# Altium PCB PCB2.PcbDoc
Units mil, origin at the board's own origin, x right, y up, seen from the top; angles counter-clockwise.
Board outline 3530 x 3213.31 mil, 4 copper layers (Top Layer, Layer 1, Layer 2, Bottom Layer), stack 63.779 mil thick; 41 components, 21 nets, 168 pads, 525 vias.
Unrouted connection lines stored in the file: 24.
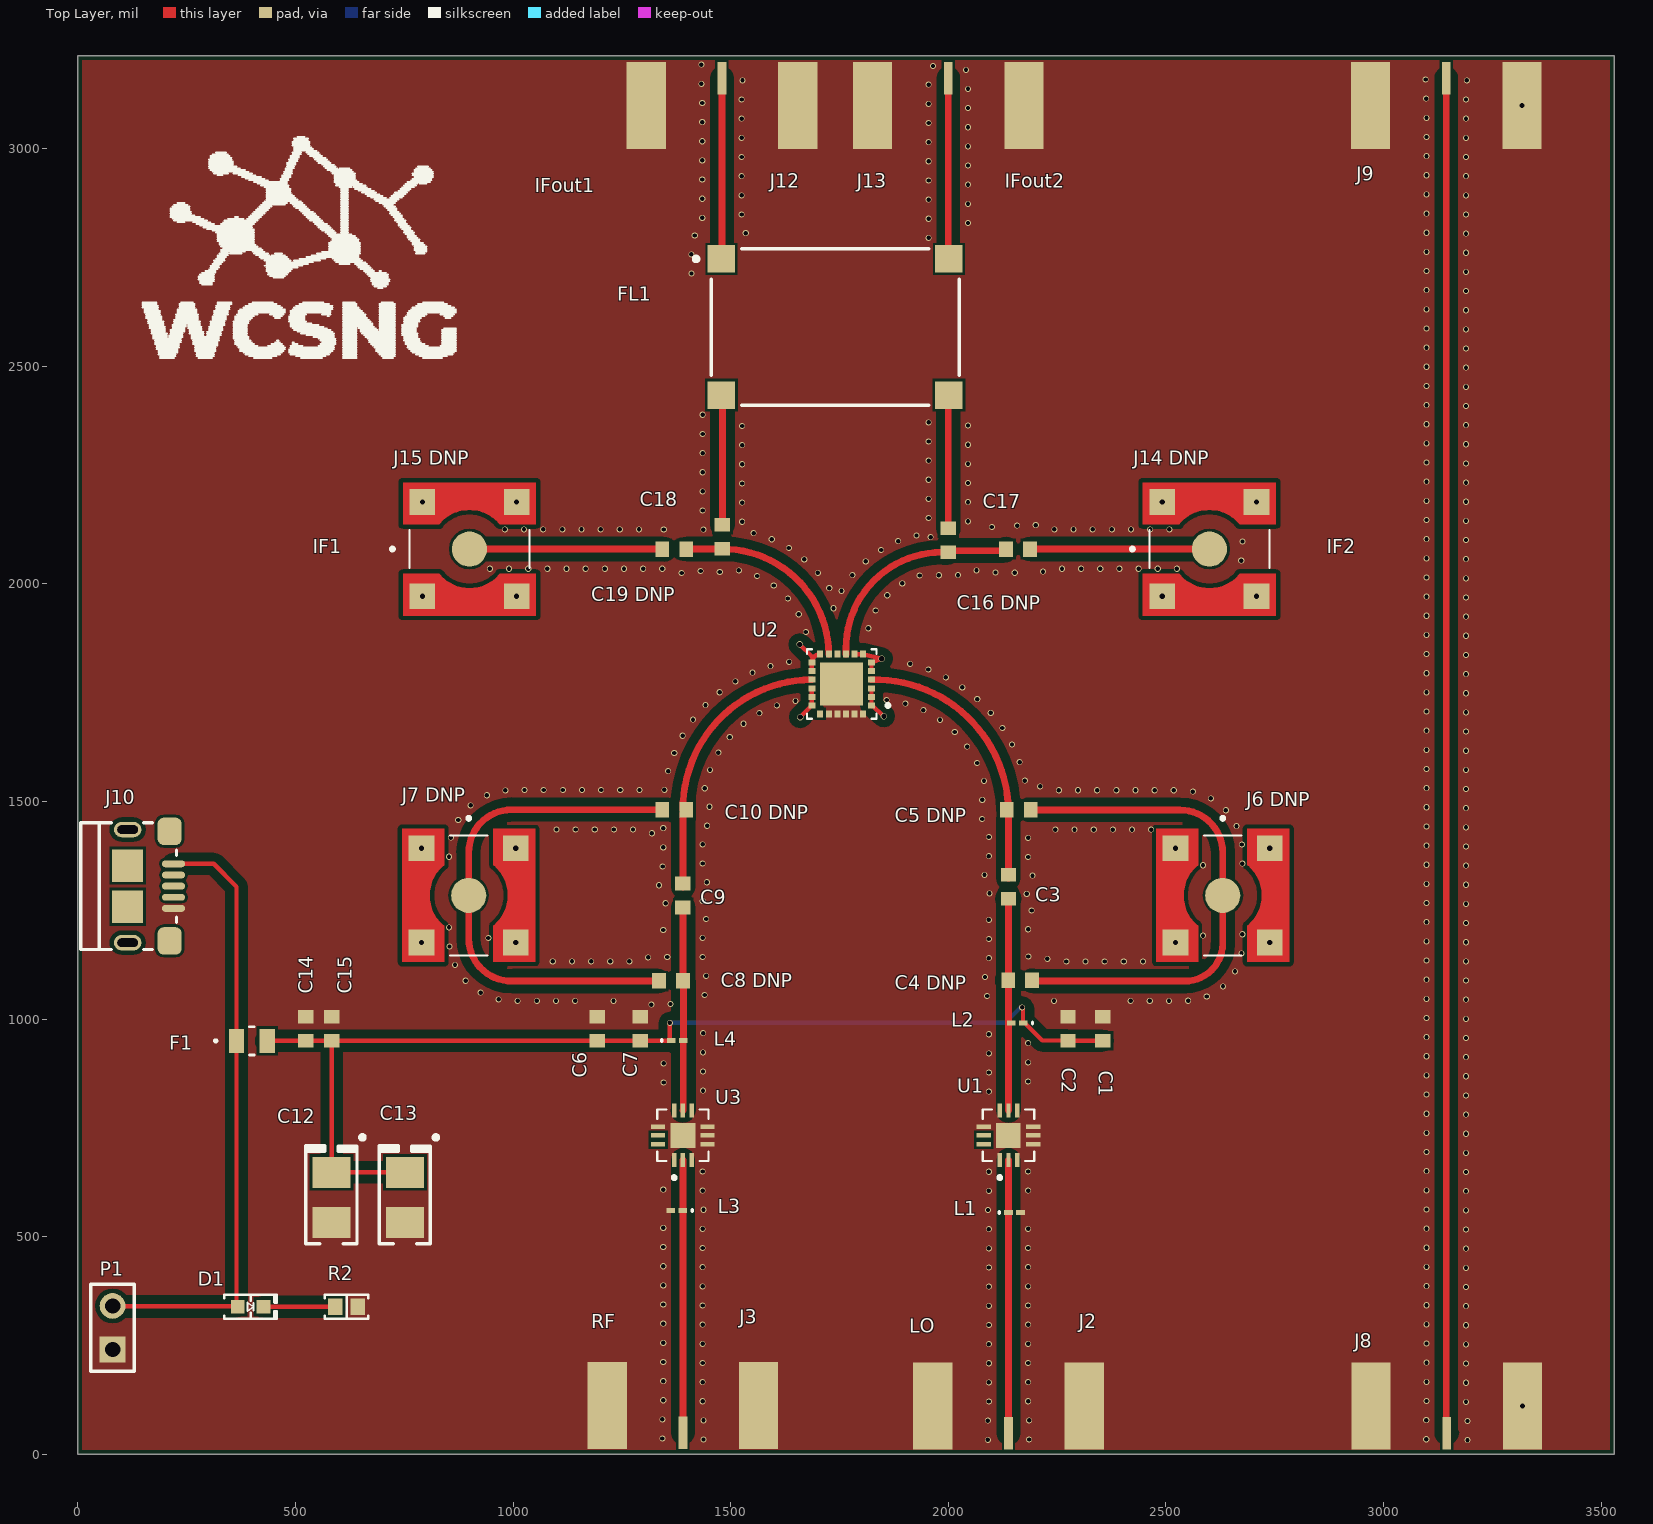
[diagram p0: Top Layer view]
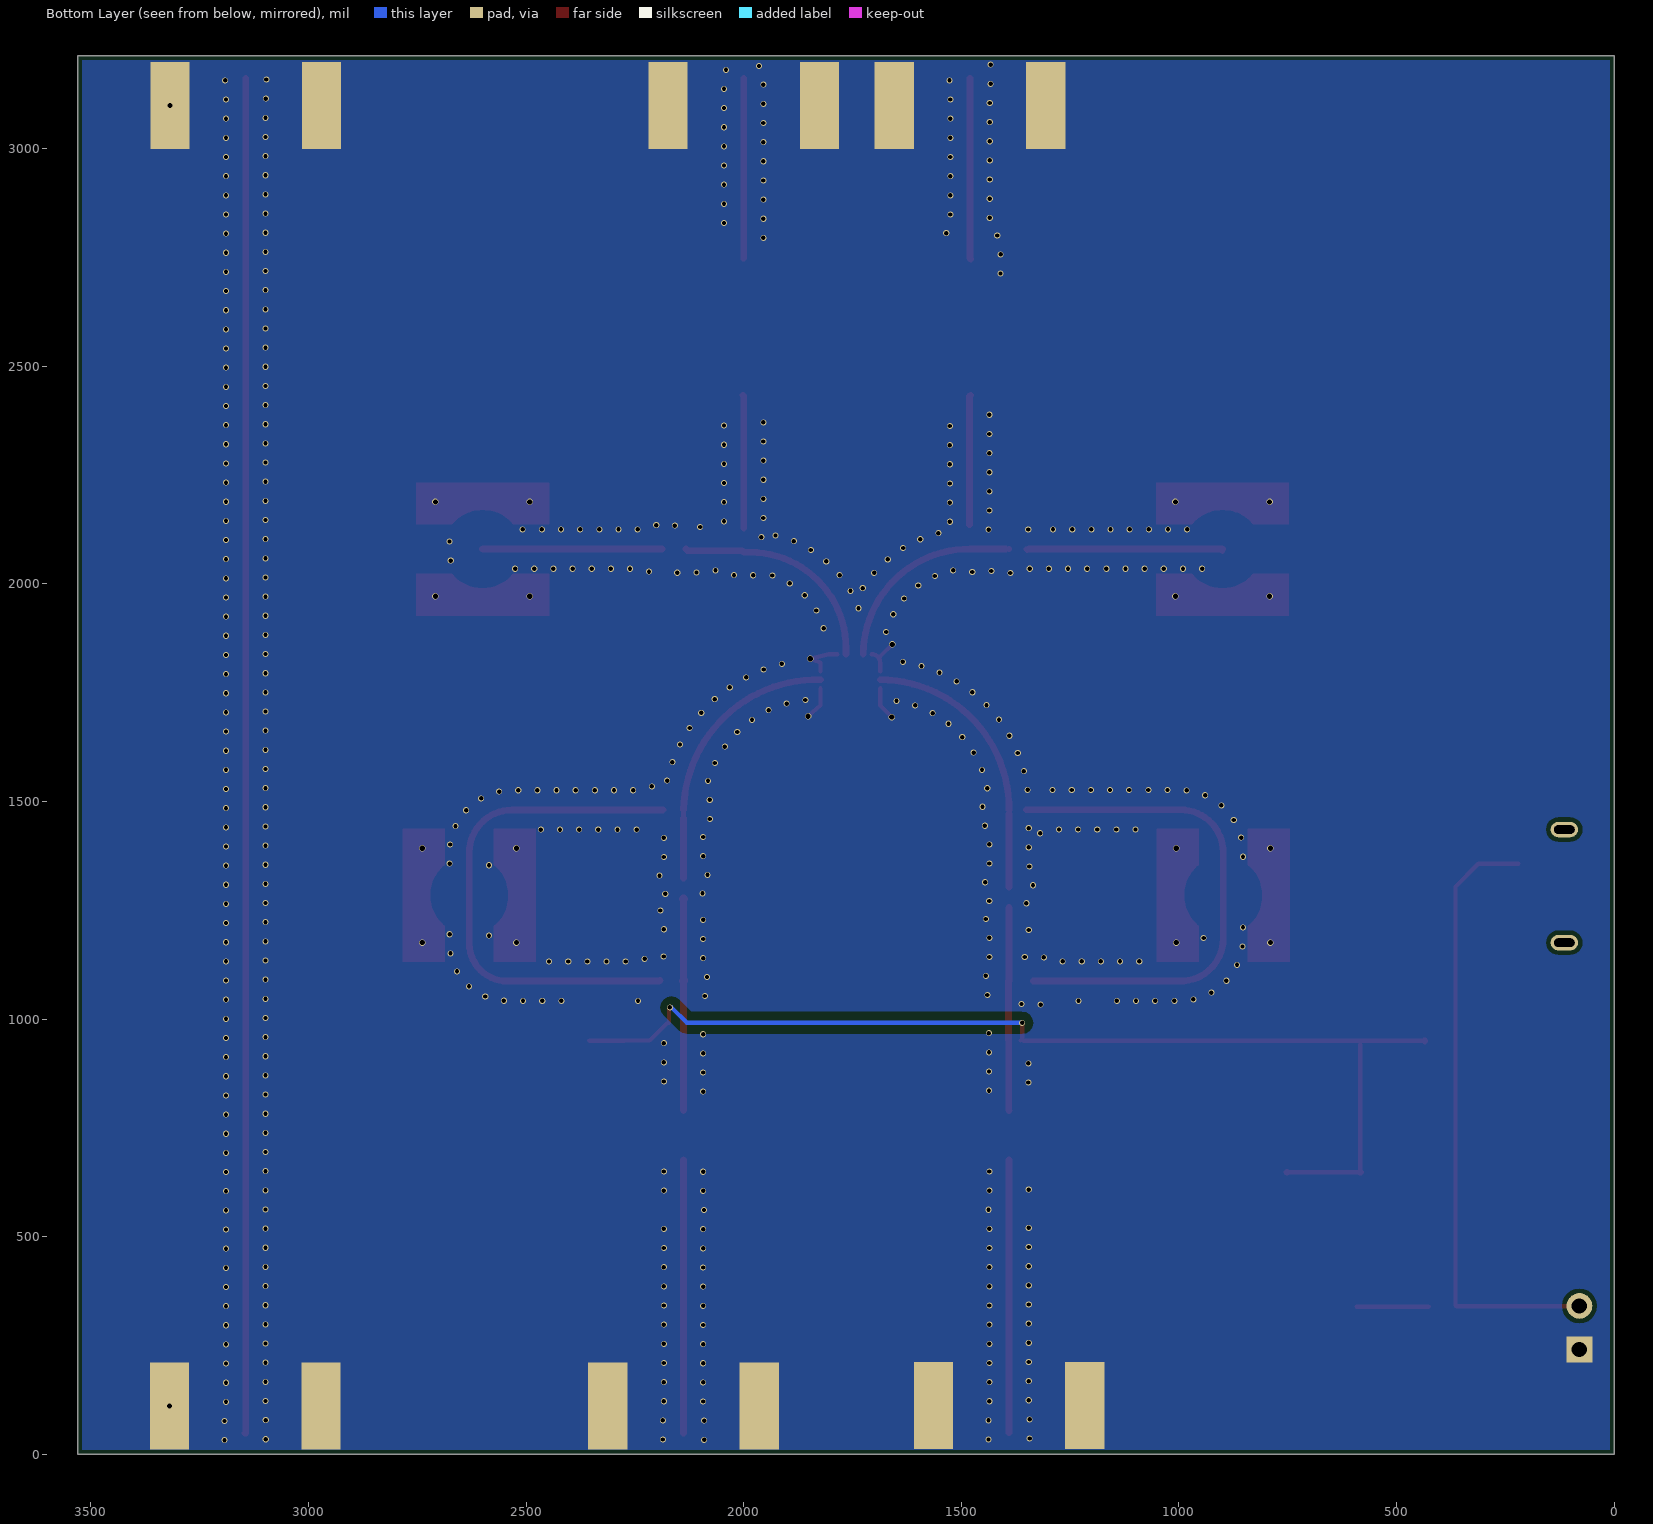
[diagram p1: Bottom Layer view, seen from below]

## Layer stack, top to bottom
Top Solder: solder mask 0.4, Solder Resist, Dk 3.5
Top Layer: signal copper 1.3778
prepreg_top: prepreg 6.8898, FR-4, Dk 4.2
Layer 1: signal copper 1.3778
core: core 44.4882, Core-025, Dk 4.2
Layer 2: signal copper 1.3778
prepreg_bottom: prepreg 6.8898, FR-4, Dk 4.2
Bottom Layer: signal copper 1.3778
Bottom Solder: solder mask 0.4, Solder Resist, Dk 3.5

## Board outline
0,3213.31 0,0 3530,0 3530,3213.31

## Design rules (kind name [scope] priority, off if disabled: settings)
BoardOutlineClearance [All] p1: gap=10 ignorepadtopadclearanceinfootprint=FALSE except(0: Arc-SplitContinuation Track-SplitContinuation SMDPad-SplitContinuation THPad-SplitContinuation Via-SplitContinuation Fill-SplitContinuation Poly-SplitContinuation Region-SplitContinuation Text-SplitContinuation)
Clearance [All] p1: gap=10 ignorepadtopadclearanceinfootprint=TRUE except(4: SMDPad-SMDPad; 6: Arc-Arc Arc-Track Arc-SMDPad Arc-Via Track-Track Track-SMDPad Track-Via SMDPad-Via SMDPad-Fill SMDPad-Poly SMDPad-Region; 13: Arc-Hole Track-Hole; 20: Arc-Fill Arc-Poly Arc-Region Track-Fill Track-Poly Track-Region)
MinimumSolderMaskSliver [All] p1: minsoldermaskwidth=1
PolygonConnect [All] p1: connectstyle=Direct reliefconductorwidth=10 reliefentries=4 polygonreliefangle="90 Angle" airgapwidth=10
RoutingVias [All] p1: holewidth=10 width=14 viastyle="Through Hole" minholewidth=10 minwidth=14 maxholewidth=16 maxwidth=20
SilkToSolderMaskClearance [IsPad] p1: minsilkscreentomaskgap=6 clearancetoexposedcopper=TRUE
SolderMaskExpansion [All] p1: expansion=4 istentingtop=FALSE
Width "Schematic Width Constraint_3" [InNet('GND')] p1: maxlimit=10 minlimit=10 preferedwidth=10
Width "Schematic Width Constraint_1" [InNet('NetD1_1')] p2: maxlimit=10 minlimit=10 preferedwidth=10
Width "Schematic Width Constraint" [InNet('NetD1_2')] p3: maxlimit=10 minlimit=10 preferedwidth=10
Width [All] p4: maxlimit=20 minlimit=3 preferedwidth=15.56
28 further rules are at their usual default settings.

## Components (designator, comment, footprint, x,y, rotation, side; value= is the part's Value field where it differs from the comment)
C1 "Cap Semi" 1608[0603] 2354.88,978 r90 top value=10nF
C2 "Cap Semi" 1608[0603] 2275,978 r90 top value=10pF
C3 "Cap Semi" 1608[0603] 2138.35,1303.86 r90 top value=100pF
"C4 DNP" "Cap Semi" 1608[0603] 2165,1089 r180 top value=100pF
"C5 DNP" "Cap Semi" 1608[0603] 2162,1481 r180 top value=100pF
C6 "Cap Semi" 1608[0603] 1193.46,978 r90 top value=10nF
C7 "Cap Semi" 1608[0603] 1291.89,978 r90 top value=10pF
"C8 DNP" "Cap Semi" 1608[0603] 1363,1088 r0 top value=100pF
C9 "Cap Semi" 1608[0603] 1390.32,1284.17 r90 top value=100pF
"C10 DNP" "Cap Semi" 1608[0603] 1370.63,1481.02 r0 top value=100pF
C12 "10µF" "CAP POL 1411_3528" 583.23,590.52 r270 top
C13 "10µF" "CAP POL 1411_3528" 752,590.52 r270 top
C14 "Cap Semi" 1608[0603] 524,978 r90 top value=1uF
C15 "Cap Semi" 1608[0603] 583.23,978 r90 top value=100nF
"C16 DNP" "Cap Semi" 1608[0603] 2160.31,2080 r0 top value=100pF
C17 "Cap Semi" 1608[0603] 2000,2100 r270 top value=100pF
C18 "Cap Semi" 1608[0603] 1481,2108 r270 top value=100pF
"C19 DNP" "Cap Semi" 1608[0603] 1370.31,2080 r0 top value=100pF
D1 "Blue" "LED 0603_1608 BLUE" 397,339 r0 top
F1 "Part Number: MFU0805FF01000P100" FUS_VISHAY_MFU08 400,950 r0 top value=Value
FL1 "11305-3S" Anaren_11305-3S_MFG 1740,2590 r0 top
J2 "SMA 50 Ohm edge" "SMA-OSHPARK-4L-1.6MM- ALT3" 2138.35,10 r90 top
J3 "SMA 50 Ohm edge" "SMA-OSHPARK-4L-1.6MM- ALT3" 1390.31,11.5 r90 top
"J6 DNP" "CONSMA001-SMD-G" *LINX_CONSMA001-SMD-G_CONSMA001-SMD-G(Primary) 2630.47,1284.17 r0 top
"J7 DNP" "CONSMA001-SMD-G" *LINX_CONSMA001-SMD-G_CONSMA001-SMD-G(Primary) 898.19,1284.17 r0 top
J8 "SMA 50 Ohm edge" "SMA-OSHPARK-4L-1.6MM- ALT3" 3145.45,10 r90 top
J9 "SMA 50 Ohm edge" "SMA-OSHPARK-4L-1.6MM- ALT3" 3144,3200 r270 top
J10 "10118193-0001LF" "FCI USB 10118193-0001LF" 116.65,1305.59 r90 top
J12 "SMA 50 Ohm edge" "SMA-OSHPARK-4L-1.6MM- ALT3" 1480,3200 r270 top
J13 "SMA 50 Ohm edge" "SMA-OSHPARK-4L-1.6MM- ALT3" 2000,3200 r270 top
"J14 DNP" "CONSMA001-SMD-G" *LINX_CONSMA001-SMD-G_CONSMA001-SMD-G(Primary) 2600,2080 r90 top
"J15 DNP" "CONSMA001-SMD-G" *LINX_CONSMA001-SMD-G_CONSMA001-SMD-G(Primary) 900,2080 r90 top
L1 "Inductor" 0603 2152.13,555.83 r0 top value=18nH
L2 "Inductor" 0603 2158,991 r180 top value=39nH
L3 "Inductor" 0603 1376.53,560 r180 top value=18nH
L4 "Inductor" 0603 1377,951 r0 top value=39nH
P1 "Header 2" HDR1X2 80,241 r90 top
R2 "1 kOhms" "RES 0603_1608" 617.59,339 r180 top
U1 "PMA3-83LN+" *QFN51P300X300X89-13N#1 2138.35,732.99 r90 top
U2 "HMC8193LC4" *PQFN50P390X390X100-25N 1755,1770 r180 top
U3 "PMA3-83LN+" *QFN51P300X300X89-13N#2 1390.31,732.99 r90 top

## Footprints (in the part's own frame and the unit in brackets; to place one, negate y for a bottom-side part, rotate by r counter-clockwise, add the part's x,y. Pads: shape width x height; smd on the part's side, far side on the other; paste and mask are expansions set on the pad)
0603 [mm] "Chip Inductor, Body 0.6x0.3mm, IPC High Density"
  rect 0.5x0.3 smd: 1(-0.35,0) 2(0.35,0)
  silkscreen extent -0.9,-0.05 -0.9,0.05, body extent -0.33,-0.18 0.33,0.18, height 0.55
1608[0603] [mm] "Chip Capacitor, Body 1.6x0.8mm, IPC High Density"
  rect 0.8x0.9 smd: 1(-0.7,0) 2(0.7,0)
  body extent -0.87,-0.48 0.87,0.48, height 1.3
*LINX_CONSMA001-SMD-G_CONSMA001-SMD-G(Primary) [mm]
  round 2.05 smd: C(0,0)
  rect 1.5x1.5 smd: G1(-2.75,2.75) G2(-2.75,-2.75) G3(2.75,-2.75) G4(2.75,2.75)
  Top Layer region: 1.44,-3.88 1.44,-1.76 1.54,-1.68 1.618,-1.605 1.705,-1.512 1.787,-1.415 1.864,-1.312 1.934,-1.206 1.999,-1.096 2.057,-0.983 2.109,-0.866 2.154,-0.747 2.193,-0.625 2.225,-0.501 2.249,-0.376 2.267,-0.25 2.278,-0.123 2.281,0.005 2.278,0.133 2.267,0.26 2.249,0.386 2.225,0.511 2.193,0.635 2.154,0.757 2.109,0.876 2.057,0.993 1.999,1.106 1.934,1.216 1.864,1.322 1.787,1.425 1.705,1.522 1.618,1.615 1.54,1.69 1.44,1.76 1.44,3.88 3.88,3.88 3.88,-3.88 1.44,-3.88
  Top Layer region: -1.44,3.88 -1.44,1.76 -1.54,1.68 -1.644,1.579 -1.728,1.486 -1.807,1.389 -1.88,1.288 -1.948,1.183 -2.01,1.075 -2.066,0.963 -2.116,0.849 -2.159,0.732 -2.197,0.612 -2.227,0.491 -2.251,0.368 -2.268,0.244 -2.278,0.12 -2.281,-0.005 -2.278,-0.13 -2.268,-0.254 -2.251,-0.378 -2.227,-0.501 -2.197,-0.622 -2.159,-0.742 -2.116,-0.859 -2.066,-0.973 -2.01,-1.085 -1.948,-1.193 -1.88,-1.298 -1.807,-1.399 -1.728,-1.496 -1.644,-1.589 -1.54,-1.69 -1.44,-1.76 -1.44,-3.88 -3.88,-3.88 -3.88,3.88 -1.44,3.88
  silkscreen extent -1.1,-3.5 1.1,4.6
*PQFN50P390X390X100-25N [mm]
  rect 0.41x0.35 smd: 1(-1.74,1.25) 2(-1.74,0.75) 3(-1.74,0.25) 4(-1.74,-0.25) 5(-1.74,-0.75) 6(-1.74,-1.25) 13(1.74,-1.25) 14(1.74,-0.75) 15(1.74,-0.25) 16(1.74,0.25) 17(1.74,0.75) 18(1.74,1.25)
  rect 0.35x0.41 smd: 7(-1.25,-1.74) 8(-0.75,-1.74) 9(-0.25,-1.74) 10(0.25,-1.74) 11(0.75,-1.74) 12(1.25,-1.74) 19(1.25,1.74) 20(0.75,1.74) 21(0.25,1.74) 22(-0.25,1.74) 23(-0.75,1.74) 24(-1.25,1.74)
  rect 2.5x2.5 smd: 25(0,0)
  silkscreen extent -2.8,-2.03 2.03,2.03
*QFN51P300X300X89-13N#1 [mm]
  rect 0.82x0.26 smd: 1(-1.445,0.51) 2(-1.445,0) 3(-1.445,-0.51) 7(1.445,-0.51) 8(1.445,0) 9(1.445,0.51)
  rect 0.26x0.82 smd: 4(-0.51,-1.445) 5(0,-1.445) 6(0.51,-1.445) 10(0.51,1.445) 11(0,1.445) 12(-0.51,1.445)
  rect 1.45x1.45 smd: 13(0,0.011)
  silkscreen extent -2.56,-1.5 1.5,1.5
*QFN51P300X300X89-13N#2 [mm]
  rect 0.82x0.26 smd: 1(-1.445,0.51) 2(-1.445,0) 3(-1.445,-0.51) 7(1.445,-0.51) 8(1.445,0) 9(1.445,0.51)
  rect 0.26x0.82 smd: 4(-0.51,-1.445) 5(0,-1.445) 6(0.51,-1.445) 10(0.51,1.445) 11(0,1.445) 12(-0.51,1.445)
  rect 1.45x1.45 smd: 13(0,0)
  silkscreen extent -2.56,-1.5 1.5,1.5
Anaren_11305-3S_MFG [mm]
  rect 1.6x1.6 smd paste+0 mask+0: 1(-6.64,3.975) 2(6.64,3.975) 3(6.64,-3.975) 4(-6.64,-3.975)
  silkscreen extent -8.23,-4.57 7.23,4.57, body extent -7.54,-4.87 7.54,4.87, height 0.25
"CAP POL 1411_3528" [mm] "Molded Capacitor, 2-Leads, Body 3.50x2.80mm, IPC Medium Density"
  rect 1.8x2.23 smd: 1(-1.46,0) 2(1.46,0)
  silkscreen extent -3.62,-1.5 2.71,1.92, body extent -1.87,-1.45 1.86,1.45, height 2
"FCI USB 10118193-0001LF" [mm] "USB 2.0 Type B Micro"
  oval 0.4x1.35 smd: 1(1.3,-2.625) 2(0.65,-2.625) 3(0,-2.625) 4(-0.65,-2.625) 5(-1.3,-2.625)
  oval 0.9x1.6 hole 0.5 slot 1.2 at 90 deg: S(-3.3,0.05) S(3.3,0.05)
  rrect50% 1.6x1.4 smd: S(-3.2,-2.4) S(3.2,-2.4)
  rect 1.9x1.8 smd: S(-1.2,0.05) S(1.2,0.05)
  silkscreen extent -3.7,-2.8 3.7,2.8, body extent -3.93,-2.9 3.93,2.76, height 2.78
FUS_VISHAY_MFU08 [mil]
  rect 35.5x55 smd: 1(-35.25,0) 2(35.25,0)
  silkscreen extent -86,-32 5,32, body extent 0,0 10,10, height 10
HDR1X2 [mm] "Connector; Header; 2 Position"
  rect 1.5x1.5 hole 0.9: 1(0,0)
  round 1.5 hole 0.9: 2(2.54,0)
  silkscreen extent -1.27,-1.27 3.81,1.27
"LED 0603_1608 BLUE" [mm] "Chip Diode, 2-Leads, Body 1.60x0.80mm, IPC Medium Density"
  rect 0.8x0.8 smd: 1(-0.75,0) 2(0.75,0)
  silkscreen extent -1.52,-0.7 1.52,0.7, body extent -0.8,-0.4 0.8,0.4, height 0.53
"RES 0603_1608" [mm] "Chip Resistor, 2-Leads, Body 1.60x0.80mm, IPC Medium Density"
  rect 0.85x0.95 smd: 1(-0.65,0) 2(0.65,0)
  silkscreen extent -1.27,-0.7 1.27,0.7, body extent -0.8,-0.4 0.8,0.4, height 0.45
"SMA-OSHPARK-4L-1.6MM- ALT3" [mil] "Short and thin signal pin"
  rect 200x90 smd: GND(101,174) GND(101,-174)
  rect 200x90 smd far side: GND(101,174) GND(101,-174)
  rect 75x20 smd: SIG(38.5,0)

## Part data
C1 C2 C3 "C4 DNP" "C5 DNP" C6 C7 "C8 DNP" C9 "C10 DNP" C14 C15 "C16 DNP" C17 C18 "C19 DNP": "Capacitor (Semiconductor SIM Model)", LatestRevisionDate=29-May-2009, LatestRevisionNote="IPC-7351 Footprint Added.", PackageDescription="Chip Capacitor", PackageReference=C1206, Published=8-Jun-2000, Publisher="Altium Limited"
C12 C13: library part T491T106K016AT, "CAP TANT 10UF 10% 16V 1411", Device Package="1411 (3528 Metric)", ESR (Equivalent Series Resistance)=8Ohm, Lifetime @ Temp.="2000 Hrs @ 125°C", Manufacturer=KEMET, Manufacturer Size Code=T, Operating Temperature="-55°C ~ 125°C", Supplier Part Number 1=399-8400-1-ND, Tolerance=±10%, Voltage - Rated=16V, Capacitance=10µF, ComponentLink1Description=Datasheet, ComponentLink1URL=https://api.kemet.com/component-edge/download/datasheet/T491T106K016AT.pdf, ComponentLink2Description="DigiKey Link", ComponentLink2URL=http://digikey.com/product-detail/en/kemet/T491T106K016AT/399-8400-1-ND/3472123, Features="General Purpose", Height - Seated (Max)="0.047\" (1.20mm)", LastUpdated="1/2/2020 12:10:45 AM", Lifecycle Status=Active, Minimum Order=1, Mounting Type="Surface Mount", Package / Case="1411 (3528 Metric)", Packaging=ReReel, PartId=5, Part Number=T491T106K016AT, Part Status=Active, Price=0.00, Series=T491, Size / Dimension="0.138\" L x 0.110\" W (3.50mm x 2.80mm)", Supplier 1=DigiKey, Type=Molded
D1: library part LTST-C194TBKT, "LED BLUE CLEAR SMD", Current - Test=20mA, Device Package="0603 (1608 Metric)", Lens Color=Colorless, Manufacturer="Lite-On Inc.", Millicandela Rating=104mcd, Supplier Part Number 1=160-1837-1-ND, Voltage - Forward (Vf) (Typ)=3.3V, Color=Blue, ComponentLink1Description=Datasheet, ComponentLink1URL=http://optoelectronics.liteon.com/upload/download/DS22-2010-0025/LTST-C194TBKT.PDF, ComponentLink2Description="DigiKey Link", ComponentLink2URL=http://digikey.com/product-detail/en/lite-on-inc/LTST-C194TBKT/160-1837-1-ND/2356236, Configuration=Standard, Height (Max)=0.45mm, LastUpdated="1/12/2020 12:13:59 AM", Lens Size="1.15mm x 0.80mm", Lens Style="Rectangle with Flat Top", Lens Transparency=Clear, Lifecycle Status=Active, Minimum Order=1, Mounting Type="Surface Mount", Package / Case="0603 (1608 Metric)", Packaging=TapeAndReel, PartId=828, Part Number=LTST-C194TBKT, Part Status=Active, Price=0.06, Series=-, Size / Dimension="1.60mm L x 0.80mm W", Supplier 1=DigiKey, Viewing Angle=130°, Wavelength - Dominant=468nm, Wavelength - Peak=468nm
F1: library part MFU0805FF01000P1, "No Description Available", Manufacturer_Part_Number=MFU0805FF01000P100, Built_By=EMA_UL_Team, Copyright="Copyright (C) 2018 Accelerated Designs. All rights reserved", RefDes=RefDes, Type=DEV, Vendor=VISHAY
J2 J3 J8 J9 J12 J13: library part SMA-OSHPARK-4L-1.6MM-ALT3, Package=SMA-OSHPARK-4L-1.6MM, Supplier Part Number 1=J658-ND, DeviceName=-OSHPARK-4L-1.6MM, DeviceSetName=SMA, GateName_1=G1, LibraryName=dword1511-connectors, Supplier 1=Digi-Key, SymbolName_1=COAX
"J6 DNP" "J7 DNP" "J14 DNP" "J15 DNP": "SMA Connector Receptacle, Female Socket 50Ohm Surface Mount Solder", Package=None, Availability=Unavailable, MF="Linx Technologies", MP=CONSMA001-SMD-G, Price=None, SnapEDA_Link=https://www.snapeda.com/parts/CONSMA001-SMD-G/Linx%20Technologies%20Inc./view-part/353460/?ref=snap
J10: "CONN RCPT USB2.0 MICRO B SMD R/A", Current Rating (Amps)="1.8A per Contact", Manufacturer="Amphenol ICC (FCI)", Operating Temperature="-30°C ~ 80°C", Supplier Part Number 1=609-4616-2-ND, Voltage - Rated=100VAC, ComponentLink1Description=Datasheet, ComponentLink1URL=https://cdn.amphenol-icc.com/media/wysiwyg/files/documentation/datasheet/inputoutput/io_usb_micro.pdf, ComponentLink2Description="DigiKey Link", ComponentLink2URL=//digikey.com/product-detail/en/amphenol-icc-fci/10118193-0001LF/609-4616-2-ND/2785388, Connector Type="USB - micro B", Features="Solder Retention", Gender=Receptacle, LastUpdated="12/9/2019 8:51:28 PM", Lifecycle Status=0, Mating Cycles=10000, Minimum Order=1, Mounting Feature=Horizontal, Mounting Type="Surface Mount, Right Angle; Through Hole", Number of Contacts=5, Number of Ports=1, Packaging=TapeAndReel, Part Number=10118193-0001LF, Part Status=Active, Price=0.21, Series=-, Shielding=Shielded, Specifications="USB 2.0", Supplier 1=DigiKey, Termination=Solder
P1: "Header, 2-Pin", LatestRevisionDate=17-Jul-2002, LatestRevisionNote="Re-released for DXP Platform.", Publisher="Altium Limited"
R2: library part CPF0603B1K0E, "RES SMD 1K OHM 0.1% 1/16W 0603", Device Package="0603 (1608 Metric)", Manufacturer="TE Connectivity Passive Product", Operating Temperature="-55°C ~ 155°C", Power (Watts)="0.063W, 1/16W", Supplier Device Package=0603, Supplier Part Number 1=A119887CT-ND, Temperature Coefficient=±25ppm/°C, Tolerance=±0.1%, ComponentLink1Description=Datasheet, ComponentLink1URL=https://www.te.com/commerce/DocumentDelivery/DDEController?Action=srchrtrv&DocNm=1773200&DocType=DS&DocLang=English, ComponentLink2Description="DigiKey Link", ComponentLink2URL=http://digikey.com/product-detail/en/te-connectivity-passive-product/CPF0603B1K0E/A119887CT-ND/4966485, Composition="Thin Film", Height - Seated (Max)="0.022\" (0.55mm)", LastUpdated="1/12/2020 12:07:17 AM", Lifecycle Status=Active, Minimum Order=1, Number of Terminations=2, Package / Case="0603 (1608 Metric)", Packaging=TapeAndReel, PartId=4877, Part Number=CPF0603B1K0E, Part Status=Active, Price=0.09, Resistance="1 kOhms", Series="CPF, Neohm", Size / Dimension="0.061\" L x 0.031\" W (1.55mm x 0.80mm)", Supplier 1=DigiKey
U1 U3: "MMIC Amplifier, Low Noise, Wideband, High IP3, 0.05 to 8.0GHz, 50ohm, SM", Package=None, Availability=Unavailable, MF=Mini-Circuits, MP=PMA3-83LN+, Price=None, SnapEDA_Link=https://www.snapeda.com/parts/PMA3-83LN%2B/Mini-Circuits/view-part/939810/?ref=snap
U2: "MIXERS", Package="LCC-24 Analog Devices", Availability=Unavailable, MF="Analog Devices", MP=HMC8193LC4, Price=None, SnapEDA_Link=https://www.snapeda.com/parts/HMC8193LC4/Analog%20Devices%20Inc./view-part/?ref=snap
L1 L2 L3 L4: Code_IEC=1005, Code_JEITA=0402, LatestRevisionDate=29-May-2009, LatestRevisionNote="IPC-7351 Footprint Added.", PackageDescription="Chip Inductor", PackageReference=0402-A, Published=8-Jun-2000, Publisher="Altium Limited"

## Via types
v1: diameter 14, hole 10, Top Layer to Bottom Layer, 503 vias
v2: diameter 15, hole 12, Top Layer to Bottom Layer, 22 vias

## Nets (pads, with @x,y where several pads share a name; then routed paths per layer and width w, separated by ;. In a path a pad name is that pad's centre, name@x,y a point inside that pad or via, vN(x,y) a via of type N, cw(c..) or ccw(c..) an arc to the next point about the centre after c; other vN are vias at no path point)
GND: "J6 DNP.G1" "J6 DNP.G2" "J6 DNP.G3" "J6 DNP.G4" "J7 DNP.G1" "J7 DNP.G2" "J7 DNP.G3" "J7 DNP.G4" "J14 DNP.G1" "J14 DNP.G2" "J14 DNP.G3" "J14 DNP.G4" "J15 DNP.G1" "J15 DNP.G2" "J15 DNP.G3" "J15 DNP.G4" C1.2 C2.2 C6.2 C7.2 C12.2 C13.2 C14.2 C15.2 J2.GND J3.GND J8.GND J9.GND J10.5 J12.GND J13.GND L1.2 L3.2 P1.1 R2.1 U1.1 U1.3 U1.4 U1.5 U1.6 U1.7 U1.9 U1.10 U1.13 U2.1 U2.2 U2.3 U2.5 U2.6 U2.7 U2.8 U2.12 U2.13 U2.14 U2.16 U2.17 U2.18 U2.20 U2.21 U2.22 U2.23 U2.24 U2.25 U3.1 U3.3 U3.4 U3.5 U3.6 U3.7 U3.9 U3.10 U3.13 | length 357.9
  Top Layer w10: v2(1658.72,1860.79) 1686.66,1832.85 1692.14,1832.85 ; v2(1659.68,1694) U2.18 U2.17 U2.16 ; U2.14 U2.13 cw(c1705.79,1819.21) 1692.14,1832.85 ; U2.12 ccw(c1705.79,1819.21) 1692.14,1832.85 ; U2.8 U2.7 v2(1847,1828) U2.6 U2.5 ; U2.3 U2.2 U2.1 v2(1852,1696)
  other v1: 3192.77,32.84 1437.63,34.13 2091.03,33.45 2185.67,34.13 3098.13,34.72 1343,36.41 3192.77,76.84 1437.63,78.13 2091.03,77.45 2185.67,78.13 3098.13,78.72 1343,80.41 3189.25,120.7 1435.57,122.09 2093.1,121.41 2183.6,122.08 3098.75,122.72 1345.06,124.36 3189.25,164.7 1435.57,166.09 2093.1,165.41 2183.6,166.08 3098.75,166.72 1345.06,168.36 3189.25,208.7 1435.57,210.09 2093.1,209.41 2183.6,210.08 3098.75,210.72 1345.06,212.36 3189.25,252.7 1435.57,254.09 2093.1,253.41 2183.6,254.08 3098.75,254.72 1345.06,256.36 3189.25,296.7 1435.57,298.09 2093.1,297.41 2183.6,298.08 3098.75,298.72 1345.06,300.36 3189.25,340.7 1435.57,342.09 2093.1,341.41 2183.6,342.08 3098.75,342.72 1345.06,344.36 3189.25,384.7 1435.57,386.09 2093.1,385.41 2183.6,386.08 3098.75,386.72 1345.06,388.36 3189.25,428.7 1435.57,430.09 2093.1,429.41 2183.6,430.08 3098.75,430.72 1345.06,432.36 3189.25,472.7 1435.57,474.09 2093.1,473.41 2183.6,474.08 3098.75,474.72 1345.06,476.36 3189.25,516.7 1435.57,518.09 2093.1,517.41 2183.6,518.08 3098.75,518.72 1345.06,520.36 2091.18,561.36 3189.25,560.7 1437.48,562.04 3098.75,562.72 2093.1,605.32 3189.25,604.7 1435.57,606 2183.6,606 3098.75,606.72 1345.06,608.28 2093.1,649.32 3189.25,648.7 1435.57,650 2183.6,650 3098.75,650.72 3189.25,692.7 3098.75,694.72 3189.25,736.7 3098.75,738.72 3189.25,780.7 3098.75,782.72 3189.25,824.7 3098.75,826.72 2093.1,833.31 1436.52,835.76 1346.02,854.29 2183.6,856.71 3189.25,868.7 3098.75,870.72 2093.1,877.31 1436.52,879.76 1346.02,898.29 2183.6,900.71 3189.25,912.7 3098.75,914.72 2093.1,921.31 1436.52,923.76 2183.6,944.71 3189.25,956.7 3098.75,958.72 2093.1,965.31 1436.64,967.76 3189.25,1000.7 3098.75,1002.72 1317.81,1033.21 1361.79,1034.62 1010.72,1042.12 1054.72,1042.12 1098.72,1042.12 1142.72,1042.12 1230.72,1042.12 2242.93,1042.07 2418.93,1042.07 2462.93,1042.07 2506.93,1042.07 2550.92,1042.31 966.84,1045.32 3189.25,1044.7 3098.75,1046.72 2593.84,1052.01 2089.16,1053.14 1440.28,1055.61 925.69,1060.9 2631.14,1075.35 891.18,1088.21 3189.25,1088.7 3098.75,1090.72 2084.37,1096.88 1443.63,1099.48 2658.71,1109.65 866.57,1124.68 1091.34,1132.62 1135.34,1132.62 1179.34,1132.62 1223.34,1132.62 1267.34,1132.62 2271.2,1132.57 2315.2,1132.57 2359.2,1132.57 2403.2,1132.57 2447.2,1132.57 3189.25,1132.7 3098.75,1134.72 2227.61,1138.54 2093.1,1140 1310.37,1141.81 1354.36,1142.62 1435.69,1142.76 2183.95,1144.04 2673.77,1150.99 854.13,1166.88 3189.25,1176.7 3098.75,1178.72 2093.1,1184 943.47,1186.38 1435.69,1186.76 2585.22,1191.84 2675.72,1194.94 1345.19,1204.92 2183.6,1206.47 852.94,1210.87 3189.25,1220.7 3098.75,1222.72 2093.1,1228 1443.6,1230.04 2191.63,1249.73 3189.25,1264.7 1350.51,1266.3 3098.75,1266.72 1435.92,1271.54 2180.36,1287.67 2094.66,1288.96 1335.28,1307.58 3189.25,1308.7 3098.75,1310.72 1445.35,1314.52 2193.38,1329.7 2083.31,1331.47 1343.81,1350.74 3189.25,1352.7 2585.22,1353.44 3098.75,1354.72 2675.72,1357.1 1435.57,1357.42 852.94,1373.07 2183.6,1372.6 2093.1,1374.37 1345.06,1394.72 3189.25,1396.7 3098.75,1398.72 2674.56,1401.08 1435.57,1401.42 857.24,1416.86 2183.6,1416.6 2093.1,1418.37 1318.93,1427.09 2246.12,1435.31 2290.12,1435.31 2334.12,1435.31 2378.12,1435.31 2422.12,1435.31 2466.12,1435.31 1099.79,1435.77 1143.79,1435.77 1187.79,1435.77 1231.79,1435.77 1275.79,1435.77 1345.06,1438.72 3189.25,1440.7 2662.21,1443.31 3098.75,1442.72 1445.9,1444.19 874.17,1457.47 2077.89,1459.66 2637.62,1479.8 3189.25,1484.7 3098.75,1486.72 1451.26,1487.86 902.6,1491.05 2078.05,1503.66 2603.12,1507.11 939.87,1514.44 2561.96,1522.65 982.47,1525.45 1026.46,1526.27 1070.46,1526.27 1114.46,1526.27 1158.46,1526.27 1202.46,1526.27 1246.46,1526.27 1290.46,1526.27 2254.07,1525.81 2298.07,1525.81 2342.07,1525.81 2386.07,1525.81 2430.07,1525.81 2474.07,1525.81 2518.07,1525.81 1347.83,1526.63 3189.25,1528.7 1440.49,1530.52 3098.75,1530.72 2211,1534.79 2082.03,1547.48 2175.85,1548.05 1356.47,1569.77 1452.63,1572.81 3189.25,1572.7 3098.75,1574.72 2066.25,1588.55 2163.79,1590.36 1370.48,1611.48 1471.87,1612.38 3189.25,1616.7 3098.75,1618.72 2043.33,1626.11 2146.52,1630.83 1497.9,1647.86 1389.63,1651.09 2014.86,1659.66 3189.25,1660.7 3098.75,1662.72 2124.26,1668.78 1529.38,1678.59 1413.63,1687.97 1980.81,1687.52 1566.07,1702.88 2097.48,1703.7 3189.25,1704.7 3098.75,1706.72 1942.84,1709.77 1606.18,1720.97 1442.09,1721.53 1901.5,1724.82 1648.96,1731.26 1858.31,1733.26 2066.6,1735.04 3189.25,1748.7 1474.73,1751.04 3098.75,1750.72 2032.09,1762.34 1510.94,1776.03 1994.48,1785.17 3189.25,1792.7 3098.75,1794.72 1550.09,1796.12 1954.33,1803.18 1591.45,1811.12 1912.27,1816.1 1634.38,1820.77 3189.25,1836.7 3098.75,1838.72 3189.25,1880.7 3098.75,1882.72 1672.73,1889.31 1816.36,1898.06 3189.25,1924.7 3098.75,1926.72 1656.37,1930.16 1833.21,1938.7 1736.19,1944.02 1631.4,1966.38 3189.25,1968.7 3098.75,1970.72 1859.73,1973.81 1754.63,1983.97 1726.57,1990.12 1599.04,1996.21 1894.14,2001.24 3189.25,2012.7 3098.75,2014.72 1560.91,2018.15 1934.29,2019.24 1779.71,2020.12 1978.28,2019.9 2022.28,2019.97 1387.31,2024.96 1700.29,2025.4 2108.61,2026.07 2152.61,2025.5 1475.03,2027.37 2217.69,2028.06 1431.08,2029.47 1518.87,2031.14 2064.89,2030.97 946.89,2034.75 990.89,2034.75 1034.89,2034.75 1078.89,2034.75 1122.89,2034.75 1166.89,2034.75 1210.89,2034.75 1254.89,2034.75 1298.89,2034.75 1342.89,2034.77 2261.18,2034.75 2305.18,2034.75 2349.18,2034.75 2393.18,2034.75 2437.18,2034.75 2481.18,2034.75 2525.18,2034.75 1810.4,2051.65 2673.05,2053.38 1669.09,2056.43 3189.25,2056.7 3098.75,2058.72 1845.69,2077.94 1633.67,2082.53 2675.81,2097.29 1884.82,2098.06 3189.25,2100.7 1594.43,2102.44 3098.75,2102.72 1959.59,2107.43 1926.85,2111.06 1552.77,2116.6 981.28,2125.25 1025.28,2125.25 1069.28,2125.25 1113.28,2125.25 1157.28,2125.25 1201.28,2125.25 1245.28,2125.25 1289.28,2125.25 1346.38,2124.77 1437.33,2124.47 2243.77,2125.25 2287.77,2125.25 2331.77,2125.25 2375.77,2125.25 2419.77,2125.25 2463.77,2125.25 2507.77,2125.25 2100,2130.72 2158.16,2133.76 2200.87,2135.04 1526.25,2142.71 2045.25,2143.71 3189.25,2144.7 3098.75,2146.72 1954.75,2151.17 1435.75,2168.44 1526.25,2186.71 2045.25,2187.71 3189.25,2188.7 3098.75,2190.72 1954.75,2195.17 1435.75,2212.44 1526.25,2230.71 2045.25,2231.71 3189.25,2232.7 3098.75,2234.72 1954.75,2239.17 1435.75,2256.44 1526.25,2274.71 2045.25,2275.71 3189.25,2276.7 3098.75,2278.72 1954.75,2283.17 1435.75,2300.44 1526.25,2318.71 2045.25,2319.71 3189.25,2320.7 3098.75,2322.72 1954.75,2327.17 1435.75,2344.44 1526.25,2362.71 2045.25,2363.71 3189.25,2364.7 3098.75,2366.72 1954.75,2371.17 1435.75,2388.44 3189.25,2408.7 3098.75,2410.72 3189.25,2452.7 3098.75,2454.72 3189.25,2496.7 3098.75,2498.72 3189.25,2540.7 3098.75,2542.72 3189.25,2584.7 3098.75,2586.72 3189.25,2628.7 3098.75,2630.72 3189.25,2672.7 3098.75,2674.72 1410.02,2713.06 3189.25,2716.7 3098.75,2718.72 1409.77,2757.06 3189.25,2760.7 3098.75,2762.72 1954.75,2794.87 1417.61,2800.35 3189.25,2804.7 1534.71,2805.73 3098.75,2806.72 2045.25,2829.12 1954.75,2838.87 1434.75,2840.88 1525.25,2848.7 3189.25,2848.7 3098.75,2850.72 2045.25,2873.12 1954.75,2882.87 1434.75,2884.88 1525.25,2892.7 3189.25,2892.7 3098.75,2894.72 2045.25,2917.12 1954.75,2926.87 1434.75,2928.88 1525.25,2936.7 3189.25,2936.7 3098.75,2938.72 2045.25,2961.12 1954.75,2970.87 1434.75,2972.88 1525.25,2980.7 3189.25,2980.7 3098.75,2982.72 2045.25,3005.12 1954.75,3014.87 1434.75,3016.88 1525.25,3024.7 3189.25,3024.7 3098.75,3026.72 2045.25,3049.12 1954.75,3058.87 1434.75,3060.88 1525.25,3068.7 3189.25,3068.7 3098.75,3070.72 2045.25,3093.12 1954.75,3102.87 1434.75,3104.88 1525.37,3112.7 3189.37,3112.7 3097.9,3114.71 2045.25,3137.12 1954.75,3146.87 1432.68,3148.83 1527.32,3156.65 3191.32,3156.65 3096.68,3158.69 2040.85,3180.9 1964.96,3189.67 1432.68,3192.83
  other v2: 3319.45,111 789.92,1175.91 1006.46,1175.91 2522.2,1175.91 2738.74,1175.91 789.92,1392.44 1006.46,1392.44 2522.2,1392.44 2738.74,1392.44 791.73,1971.73 1008.27,1971.73 2491.73,1971.73 2708.27,1971.73 791.73,2188.27 1008.27,2188.27 2491.73,2188.27 2708.27,2188.27 3318,3099
NetC3_1: "C4 DNP.2" C3.1 L2.2 U1.8 | length 487.2
  Top Layer w15.56: U1.8 2138.35,1088.09 ; 2138.35,1089.45 C3.1@2138.35,1275.85
  Top Layer w19.68: 2137.89,1089.45 2137.44,1089 2138.35,1088.09 ; C3.1@2137.89,1275.85 C3.1
NetC3_2: "C5 DNP.2" C3.2 U2.4 | length 639.6
  Top Layer w12.56: 2138.35,1461.34 2138.35,1481.02
  Top Layer w15.56: U2.4 cw(c1831.52,1473.01) 2138.35,1481.02 ; C3.2@2138.35,1323.54 2138.35,1382.6 2138.35,1461.34
"NetC4 DNP_1": "C4 DNP.1" "C5 DNP.1" "J6 DNP.C" | length 1197.2
  Top Layer w10: 2629.54,1383.53 2630.47,1382.6
  Top Layer w15.56: 2185.59,1481.02 2186.06,1480.56 2532.51,1480.56 cw(c2532.51,1382.6) 2630.47,1382.6 2630.47,1284.17 2630.47,1174.28 ; 2192.56,1089 2194.24,1087.32 2542.76,1087.32 ccw(c2543.52,1174.28) 2630.46,1172.56
"NetC8 DNP_1": "C8 DNP.1" "C10 DNP.1" "J7 DNP.C" | length 1197.7
  Top Layer w12.56: 1334.81,1087.37 1335.44,1088
  Top Layer w15.56: 898.2,1184.01 ccw(c996.58,1185.75) 998.32,1087.37 1334.81,1087.37 ; 898.19,1185.75 898.19,1284.17 898.19,1382.6 cw(c996.61,1382.6) 996.61,1481.02 1350.94,1481.02
"NetC8 DNP_2": "C8 DNP.2" C9.1 L4.2 U3.8 | length 465.8
  Top Layer w15.56: U3.8 1391.27,790.83 L4.2@1391.27,949.05 ; C9.1 1390.44,1256.49 1390.44,1088.12 1390.56,1088 1391.39,1087.17 L4.2@1391.39,950.83
NetC9_2: "C10 DNP.2" C9.2 U2.15 | length 644.5
  Top Layer w12.56: 1390.31,1471.76 1390.46,1471.9 cw(c1685.45,1481.02) 1390.32,1481.02
  Top Layer w15.56: C9.2@1390.31,1303.86 1390.31,1471.76 ; 1390.31,1481.02 cw(c1687.81,1482.34) U2.15
"NetC16 DNP_1": "C16 DNP.1" C17.2 U2.9 | length 510.2
  Top Layer w15.56: U2.9 1764.84,1851.69 cw(c1985.6,1851.69) 1985.6,2072.44 C17.2 2003.78,2076.22 2128.98,2076.22 2132.76,2080
"NetC16 DNP_2": "C16 DNP.2" "J14 DNP.C" | length 412.1
  Top Layer w15.56: 2187.87,2080 2600,2080
NetC17_1: C17.1 FL1.3 | length 306.5
  Top Layer w15.56: C17.1 2000,2432.09 FL1.3
NetC18_1: C18.1 FL1.4 | length 298.9
  Top Layer w15.56: FL1.4 1481,2431.09 C18.1
NetC18_2: "C19 DNP.2" C18.2 U2.11 | length 465.3
  Top Layer w12.56: 1390,2080 1390.16,2080.16 ; C18.2@1479.84,2080.16 C18.2@1480,2080.31
  Top Layer w15.56: 1397.87,2080 1398.09,2080.22 C18.2@1479.78,2080.22 ; C18.2@1479.84,2080.16 C18.2@1479.78,2080.22 ; U2.11 ccw(c1481.8,1836.52) C18.2@1479.81,2080.19
"NetC19 DNP_1": "C19 DNP.1" "J15 DNP.C" | length 452.7
  Top Layer w12.56: 900,2075 902.5,2077.5 ; 1348.13,2077.5 1350.63,2080
  Top Layer w15.56: 900,2080 1342.76,2080 1345.63,2080
NetD1_1: D1.1 F1.1 J10.1 P1.2 | length 1414.5
  Top Layer w10: P1.2@80,340 363.03,340 364.75,341.72 F1.1 364.75,1304.25 312.23,1356.77 J10.1
NetD1_2: D1.2 R2.2 | length 165.5
  Top Layer w10: D1.2 R2.2
NetFL1_1: FL1.1 J12.SIG | length 415.6
  Top Layer w15.56: FL1.1 1480,2747.91 J12.SIG
NetFL1_2: FL1.2 J13.SIG | length 415.6
  Top Layer w12.56: FL1.2@2000,2747.91 FL1.2
  Top Layer w15.56: FL1.2@2000,2747.91 J13.SIG
NetJ2_SIG: J2.SIG L1.1 U1.2 | length 627.6
  Top Layer w15.56: J2.SIG L1.1 U1.2
NetJ3_SIG: J3.SIG L3.1 U3.2 | length 626.1
  Top Layer w15.56: J3.SIG L3.1 U3.2
NetJ8_SIG: J8.SIG J9.SIG | length 3113.8
  Top Layer w15.56: J9.SIG 3144,49.95 ccw(c3145.45,49.95) J8.SIG
VDD: C1.1 C2.1 C6.1 C7.1 C12.1 C13.1 C14.1 C15.1 F1.2 L2.1 L4.1 | length 2481.8
  Top Layer w10: F1.2@435.69,950.44 C14.1 C15.1 C6.1 C7.1@1290.98,950.44 ; C15.1@583.23,941.65 C12.1 C13.1 ; C7.1 L4.1@1356.72,950.44 ; v1(1360.47,991.51) 1360.47,953.75 L4.1 ; v1(2169.78,1027) 2169.78,1025.92 2171.78,1023.92 L2.1 2175.72,991 2215.72,951 2274.44,951 C2.1 C1.1
  Top Layer w15.56: F1.2 F1.2@435.69,950.44
  Bottom Layer w10: v1(1360.47,991.51) 1360.72,991.75 2058.75,991.75 2059,992 2131,992 v1@2166,1027
pads on no net: J10.2 J10.3 J10.4 J10.S U1.11 U1.12 U2.10 U2.19 U3.11 U3.12

## Polygon pours and split planes (outlines as drawn)
GND on Bottom Layer "GND_PLANE_BOTTOM" (solid, pour order 22): 0,3213.31 0,0 3530,0 3530,3213.31
GND on Top Layer "GND_PLANE_TOP" (solid, pour order 20): 0,3213.31 0,0 3530,0 3530,3213.31

## Other copper
Top Layer:
  pour cut-out: 3437.56,-34.72
  pour cut-out: 3437.56,-34.72

## Silkscreen, mask and mechanical layers (free items; w line width, h text height)
Top Overlay:
  drawing of 588 lines, arcs and shapes, not listed
  text "IFout2" at 2130,2910 h32
  text "IFout1" at 1050,2900 h32
  text "IF1" at 540,2070 h32
  text "IF2" at 2870,2070 h32
  text "RF" at 1180,290 h32
  text "LO" at 1910,280 h32